# Altium PCB PCB1.PcbDoc
Units mm, origin at the board's own origin, x right, y up, seen from the top; angles counter-clockwise.
Board outline 34.29 x 31.88 mm, 2 copper layers (Top Layer, Bottom Layer); 10 components, 11 nets, 51 pads, 0 vias.
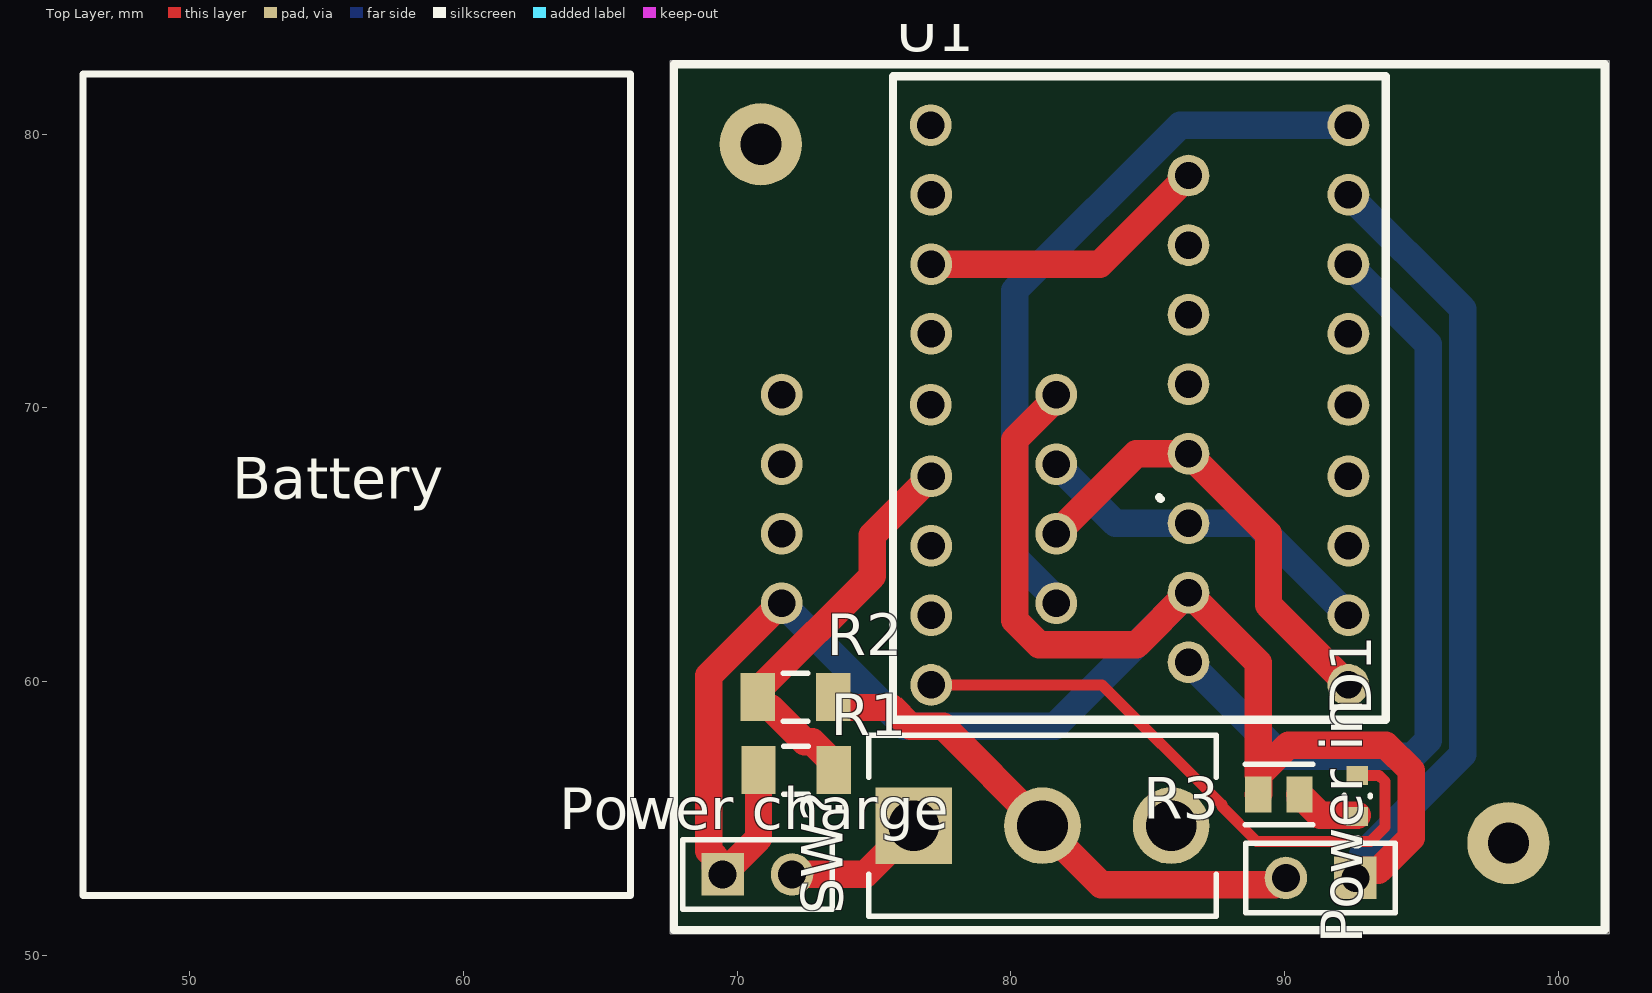
[diagram p0: Top Layer view]
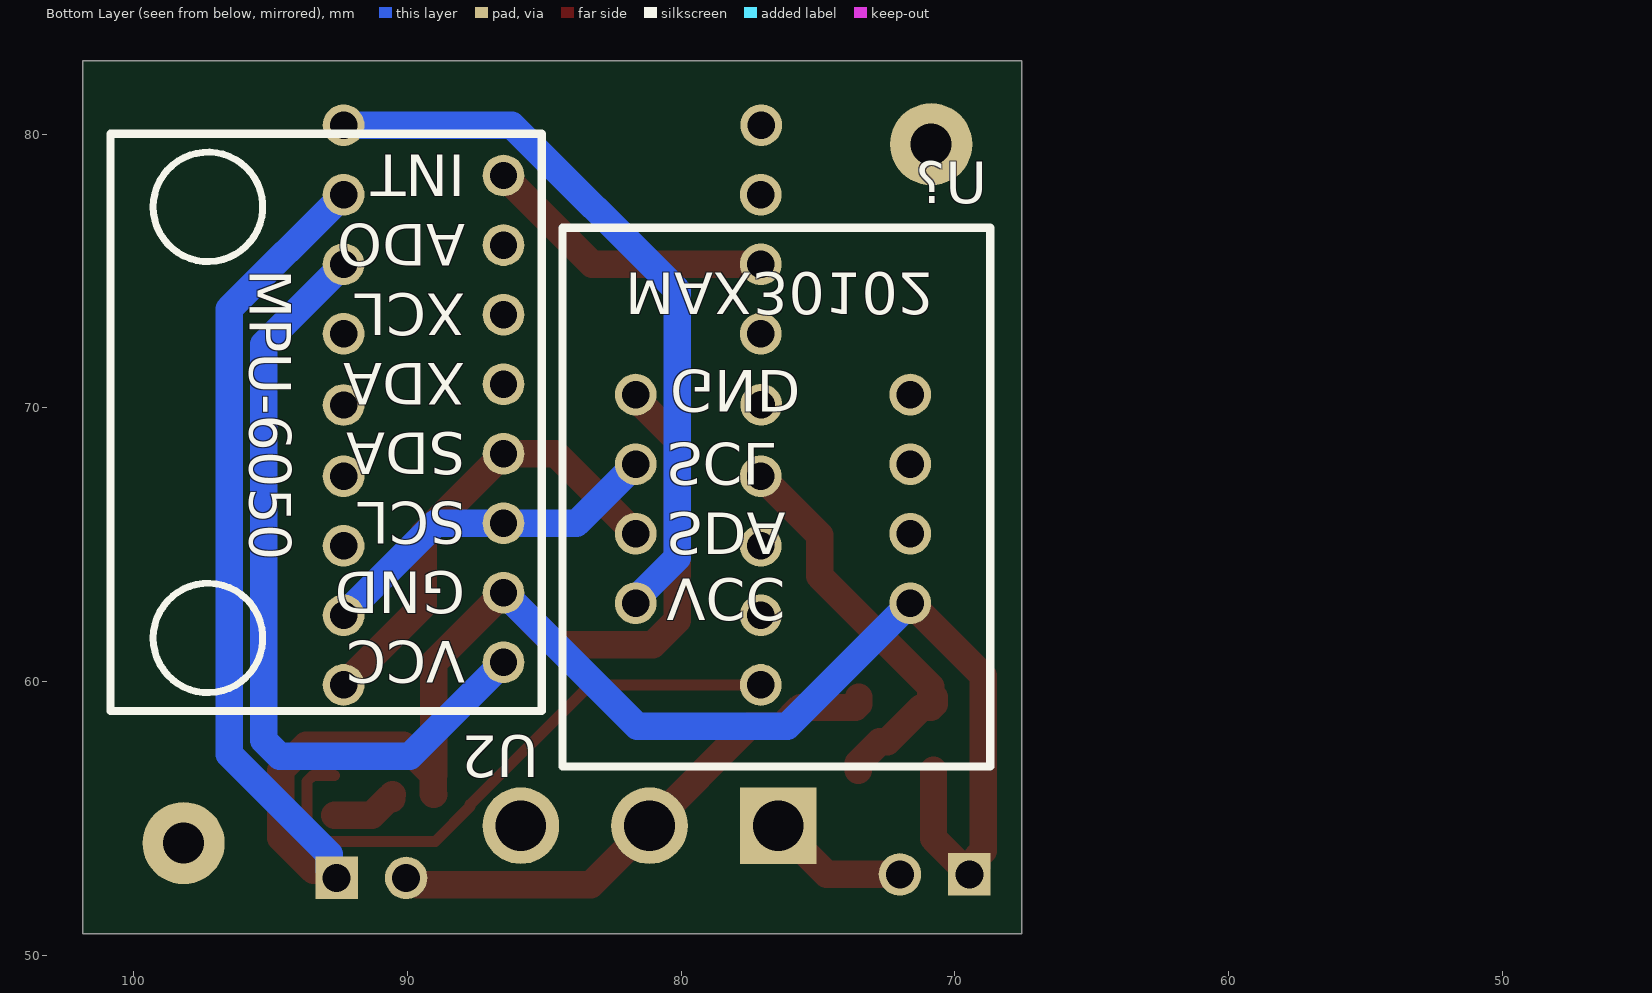
[diagram p1: Bottom Layer view, seen from below]
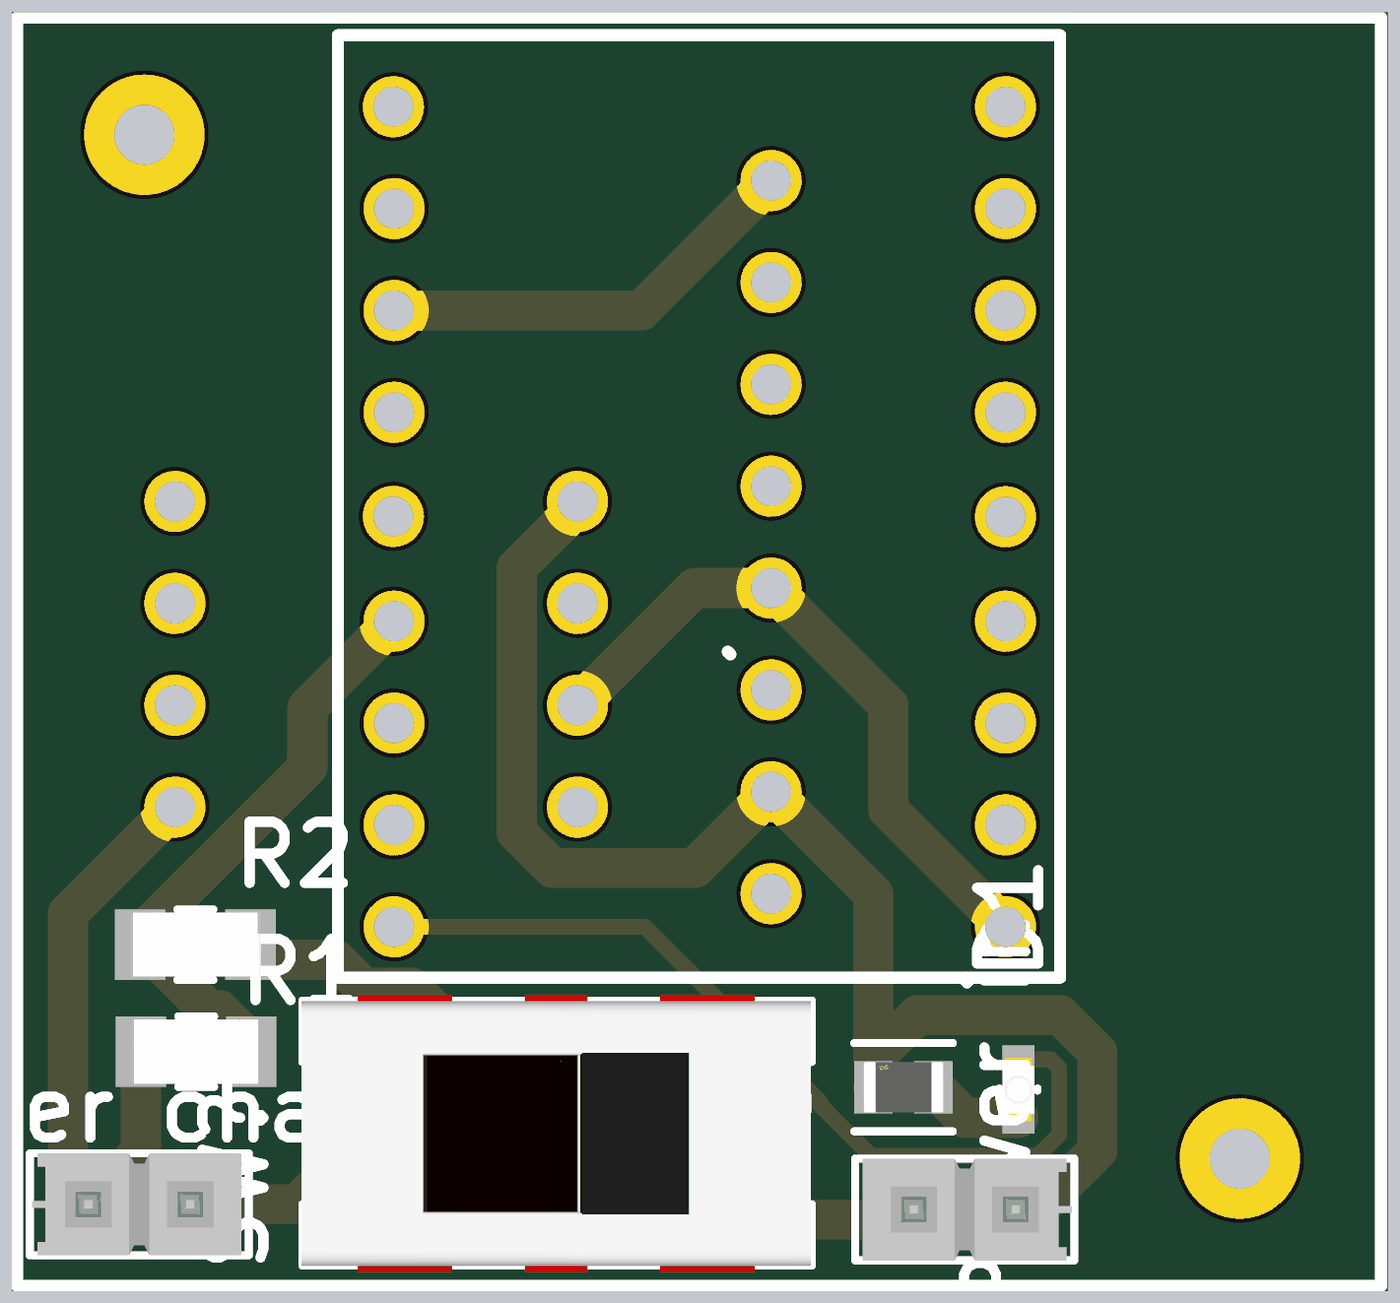
[diagram p2: 3D render of the assembled board from above, using the file's embedded part models]

## Layer stack, top to bottom
Top Solder: solder mask 0.0102, Solder Resist, Dk 3.5
Top Layer: signal copper 0.0356
Dielectric 1: dielectric 0.32, FR-4, Dk 4.8
Bottom Layer: signal copper 0.0356
Bottom Solder: solder mask 0.0102, Solder Resist, Dk 3.5

## Board outline
67.564,82.677 67.564,50.8 101.854,50.8 101.854,82.677

## Design rules (kind name [scope] priority, off if disabled: settings)
Clearance [All] p1: gap=0.254 ignorepadtopadclearanceinfootprint=FALSE
PolygonConnect [All] p1: connectstyle=Relief reliefconductorwidth=0.254 reliefentries=4 polygonreliefangle="90 Angle" airgapwidth=0.254
RoutingVias [All] p1: holewidth=0.711 width=1.27 viastyle="Through Hole" minholewidth=0.711 minwidth=1.27 maxholewidth=0.711 maxwidth=1.27
SolderMaskExpansion [All] p1: expansion=0.102 istentingtop=FALSE
SupplyNets "Schematic Supply Nets_1" [InNet('B-')] p1: voltage=0.000
Width [All] p1: maxlimit=2 minlimit=0.254 preferedwidth=1
30 further rules are at their usual default settings.

## Components (designator, comment, footprint, x,y, rotation, side; value= is the part's Value field where it differs from the comment)
D1 "LED INDICATOR" FP-APHD1608LZGCK-MFG 92.652,55.822 r90 top
"Power charge" "" SMTC-TSW-102-26-XX-S 69.469,52.959 r0 top
"Power in" "" SMTC-TSW-102-26-XX-S 92.583,52.832 r180 top
R1 "100k" FP-MCA1206-IPC_B 72.157,56.769 r0 top
R2 "100k" FP-MCA1206-IPC_B 72.136,59.436 r0 top
R3 "1k" FP-TFCR0805-IPC_C 89.789,55.88 r0 top
SW? "1101M2S3CGE2" FP-1101M2S3CGE2-MFG 81.153,54.737 r90 top
U1 "ESP32S3_supermini" PCBComponent_1#1 75.692,58.61 r0 top
U2 "MPU6050" U? 92.837,81.661 r0 bottom
U? "MAX30102" PCBComponent_1#2 92.964,55.626 r90 bottom

## Footprints (in the part's own frame and the unit in brackets; to place one, negate y for a bottom-side part, rotate by r counter-clockwise, add the part's x,y. Pads: shape width x height; smd on the part's side, far side on the other; paste and mask are expansions set on the pad)
FP-1101M2S3CGE2-MFG [mm]
  rect 2.8x2.8 hole 1.85 paste-2539.97 mask+0: 1(0,4.7)
  round 2.8 hole 1.85 paste-2539.97 mask+0: 2(0,0) 3(0,-4.7)
  silkscreen extent -3.3,-6.35 3.3,6.35, body extent -3.4,-6.45 3.4,6.45, height 0.25
FP-APHD1608LZGCK-MFG [mm]
  rect 0.7x0.8 smd paste+0 mask+0: 1(-0.75,0) 2(0.75,0)
  silkscreen extent -1.8,-0.48 0.03,0.48, body extent -1.2,-0.58 1.2,0.58, height 0.25
FP-MCA1206-IPC_B [mm]
  rect 1.256x1.758 smd paste+0 mask+0: 1(-1.376,0) 2(1.376,0)
  silkscreen extent -0.45,-0.88 0.45,0.88, body extent -2.25,-1.13 2.25,1.13, height 0.25
FP-TFCR0805-IPC_C [mm]
  rect 0.956x1.308 smd paste+0 mask+0: 1(-0.751,0) 2(0.751,0)
  silkscreen extent -1.23,-1.1 1.23,1.1, body extent -1.33,-0.8 1.33,0.8, height 0.25
PCBComponent_1#1 [mil]
  round 60 hole 39.37: 1(55,655) 2(55,555) 3(54.33,452.83) 3.3V(655,655) 4(55,350) 5(55,250) 5V(655,855) 6(55,150) 7(55,50) 8(655,50) 9(655,150) 10(655,250) 11(655,350) 12(655,452.5) 13(655,555) 14(54.33,855) 15(55,755) GND(655,755)
  silkscreen extent 0,0 709,925
PCBComponent_1#2 [mil]
  round 60 hole 39.37: 1(285,-840) 2(385,-840) 3(485,-840) 4(585,-840) 5(585,-445) 6(485,-445) 7(385,-445) 8(285,-445)
  silkscreen extent 50,-955 825,-340
SMTC-TSW-102-26-XX-S [mm] ".025 SQ Post Terminal Strip Assembly, 1x2 Pins, Vertical, 2.54mm Pitch, Male"
  rect 1.55x1.55 hole 1.02: 1(0,0)
  round 1.55 hole 1.02: 2(2.54,0)
  silkscreen extent -1.46,-1.27 4,1.27, body extent -1.4,-1.27 3.81,1.27, height 8.38
U? [mil]
  round 60 hole 39.37: 1(-250,825) 2(-250,725) 3(-250,625) 4(-250,525) 5(-250,425) 6(-250,325) 7(-250,225) 8(-250,125)
  silkscreen extent -305,65 315,895

## Part data
D1: library part CMP-44529-000045-1, "LED GREEN CLEAR 1608 SMD", Case Code (Imperial)=0603, Case Code (Metric)=1608, Color=Green, Forward Voltage=2.65V, Lens Color=Colorless, Test Current=2mA, Case/Package=0603, Dominant Wavelength=525nm, Height=0.75mm, Length=1.6mm, Lens Size=0.7mm, Lens Style=Round, Lens Transparency=Clear, Luminous Intensity=180mcd, Mount="Surface Mount", Packaging="Tape and Reel", Viewing Angle=100°, Width=0.8mm
"Power charge" "Power in": library part CMP-1024-00327-1, "0.025\" SQ Post Header, Through-hole, Vertical, -55 to 125 degC, 2.54 mm Pitch, 2-Pin, Male, RoHS", Manufacturer=Samtec, PartNumber=TSW-102-26-G-S, Temperature Range="-55 to 125 degC", ComponentLink1Description="Manufacturer URL", ComponentLink1URL=http://www.samtec.com, ComponentLink2Description=Datasheet, ComponentLink2URL=http://www.samtec.com/documents/webfiles/pdf/TSW_TH.PDF, ComponentLink3Description="Package Specification", ComponentLink3URL=http://www.samtec.com/documents/webfiles/cpdf/TSW-XXX-XX-XXX-X-XX-XXX-MKT.pdf, DatasheetVersion=F-214, Mounting Technology=Through-hole, Orientation=Vertical, PackageDescription=".025[0.64] SQ. Post Terminal Strip Assembly", PackageReference=TSW-102-26-XX-S, PackageVersion="DM, 8/1988", Pitch="2.54 mm", RoHS=True
R1 R2: library part CMP-02407-011266-1, "Res MC AT Professional Thin Film 1206 10kΩ 0.5% 0.4W ±25ppm/°C Molded Paper T/R", Case Code (Imperial)=1206, Case Code (Metric)=3216, Max Operating Temperature=175°C, Max Power Dissipation=400mW, Min Operating Temperature=-55°C, Resistance=10kR, Resistor Type="Thin Film", Temperature Coefficient=25ppm/°C, Tolerance=0.5%, Voltage Rating=200V, Case/Package=1206, Features="Automotive AEC-Q200", Height=0.55mm, Length=3.2mm, Number of Terminations=2, Packaging="Tape and Reel", Power Rating=400mW, RoHS Compliant=Yes, Series="MCA AT - Professional", Termination=SMD/SMT, Weight=0.000325oz, Width=1.6mm
R3: library part CMP-250906-253940-1, "RES Thin Film,  60.4Ω, 0.5%, 0.125W, 25ppm/°C, 0805"
SW?: library part CMP-10038-000004-1, "SWITCH SLIDE SPDT 6A 120V", Contact Current Rating=6A, Contact Resistance=10mΩ, Manufacturer="C&K Components", Temperature="-30°C to +65°C", Temperature Range High=+65°C, Temperature Range Low=-30°C, Voltage Rating Ac=120V, Voltage Rating Dc=28V, Automotive=No, Category=Switch, ComponentLink2Description=Datasheet, ComponentLink2URL=https://www.ckswitches.com/media/1429/1000.pdf, Device Class L1=Electromechanical, Device Class L2=Switches, Device Class L3="Slide Switches", Digikey Description="SWITCH SLIDE SPDT 6A 120V", Electromechanical Life=40000Cycles, Height=13.34mm, Lead Free=Yes, Manufacturer Part Number=1101M2S3CGE2, Mount="Through Hole", Mouser Description="Switch Slide ON None ON SPDT Top Slide 6A 250VAC 28VDC 0.4VA PC Pins Thru-Hole Bulk", Octopart=https://octopart.com/1101m2s3cge2-c%26k+components-2817222, Package=1101M2S3CGE2, RoHS=TRUE, Throw Configuration=SPDT

## Free pads (board coordinates)
  round 3 hole 1.5: Hole_41(98.171,54.102) Hole_42(70.866,79.629)

## Nets (pads, with @x,y where several pads share a name; then routed paths per layer and width w, separated by ;. In a path a pad name is that pad's centre, name@x,y a point inside that pad or via, vN(x,y) a via of type N, cw(c..) or ccw(c..) an arc to the next point about the centre after c; other vN are vias at no path point)
4.2V: U1.5V U?.8 | length 26.7
  Bottom Layer w1: U?.8 81.661,63.007 80.145,64.523 80.145,74.288 86.185,80.328 U1.5V
B+: "Power in.2" R2.2 SW?.2 | length 19.6
  Top Layer w1: R2.2 73.512,59.185 73.64,59.057 75.64,59.057 76.333,58.364 77.526,58.364 SW?.2 83.307,52.583 89.645,52.583 89.894,52.832 90.043,52.832
B-: "Power charge.1" "Power in.1" R1.1 R3.1 U1.GND U2.2 U?.1 U?.5 | length 98.9
  Top Layer w1: R1.1 70.781,54.271 69.469,52.959 69.194,53.234 69.194,53.587 68.961,53.82 68.961,60.211 71.615,62.865 U?.1 ; U?.5 81.661,70.343 80.145,68.827 80.145,62.237 81.033,61.349 84.59,61.349 U2.2 89.038,60.695 89.038,56.598 ; R3.1 89.06,55.902 89.06,56.598 90.138,57.677 93.698,57.677 94.618,56.756 94.618,54.297 93.428,53.107 92.858,53.107 92.583,52.832
  Bottom Layer w1: U?.1 76.129,58.364 81.605,58.364 U2.2 ; U1.GND 96.504,73.612 96.504,57.343 92.858,53.697 92.858,53.107 92.583,52.832
INT_MPU: U1.1 U2.8 | length 10.7
  Top Layer w1: U1.1 83.248,75.248 U2.8
LED: D1.2 U1.7 | length 22
  Top Layer w0.4: U1.7 83.331,59.88 87.707,55.505 87.707,55.437 88.98,54.164 93.136,54.164 93.664,54.692 93.664,56.361 93.453,56.573 D1.2
NetD1_1: D1.1 R3.2 | length 2.5
  Top Layer w1: R3.2 90.562,55.858 90.562,55.726 90.694,55.726 91.302,55.118 D1.1@92.652,55.118
"NetPower charge_2": "Power charge.2" SW?.1 | length 5.2
  Top Layer w1: 72.009,52.959 74.675,52.959 SW?.1
NetR1_2: R1.2 R2.1 U1.4 | length 14.8
  Top Layer w1: R2.1@70.76,59.363 70.76,59.185 70.888,59.057 71.21,59.057 72.464,57.803 72.75,57.803 73.533,57.02 R1.2 ; R2.1 70.888,59.564 70.888,59.815 74.93,63.857 74.93,65.341 U1.4
SCL: U1.9 U2.3 U?.6 | length 13
  Bottom Layer w1: U?.6 83.82,65.786 U2.3 88.963,65.786 U1.9
SDA: U1.8 U2.4 U?.7 | length 17
  Top Layer w1: U?.7 84.582,68.326 U2.4 89.408,65.405 89.408,62.801 U1.8 U1.8@92.429,59.78
VCC: U1.3.3V U2.1 | length 29
  Bottom Layer w1: U2.1 89.916,57.277 94.664,57.277 95.25,57.863 95.25,72.326 U1.3.3V
pads on no net: SW?.3 U1.2 U1.3 U1.5 U1.6 U1.10 U1.11 U1.12 U1.13 U1.14 U1.15 U2.5 U2.6 U2.7 U?.2 U?.3 U?.4

## Silkscreen, mask and mechanical layers (free items; w line width, h text height)
Top Overlay:
  lines w0.254: 46.101,52.197 66.101,52.197 66.101,82.197 46.101,82.197 46.101,52.197
  lines w0.3: 85.407,66.739 85.471,66.675 ; 67.691,50.927 67.691,82.55 101.691,82.55 101.691,82.514 101.691,50.927 67.691,50.927
  text "Battery" at 51.562,66.675 h1.52

## Text inside footprints (layer, text, board x,y; h text height)
U2: Bottom Overlay "MPU-6050" at 95.758,75.057 h1.52 r90; Bottom Overlay "VCC" at 87.884,61.468 h1.52 r180; Bottom Overlay "GND" at 87.884,64.008 h1.52 r180; Bottom Overlay "SCL" at 87.884,66.548 h1.52 r180; Bottom Overlay "SDA" at 87.884,69.088 h1.52 r180; Bottom Overlay "XDA" at 87.884,71.628 h1.52 r180; Bottom Overlay "XCL" at 87.884,74.168 h1.52 r180; Bottom Overlay "ADO" at 87.884,76.708 h1.52 r180; Bottom Overlay "INT" at 87.884,79.248 h1.52 r180
U?: Bottom Overlay "SCL" at 80.518,68.707 h1.52 r180; Bottom Overlay "SDA" at 80.518,66.167 h1.52 r180; Bottom Overlay "GND" at 80.391,71.374 h1.52 r180; Bottom Overlay "VCC" at 80.518,63.754 h1.52 r180